# Altium PCB STM32 24V Industrial IO Bridge.PcbDoc (part 3 of 3)
Units mil, origin at the board's own origin, x right, y up, seen from the top; angles counter-clockwise.
Board outline 3937.01 x 3149.61 mil, 2 copper layers (Top Layer, Bottom Layer); 143 components, 89 nets, 439 pads, 318 vias.
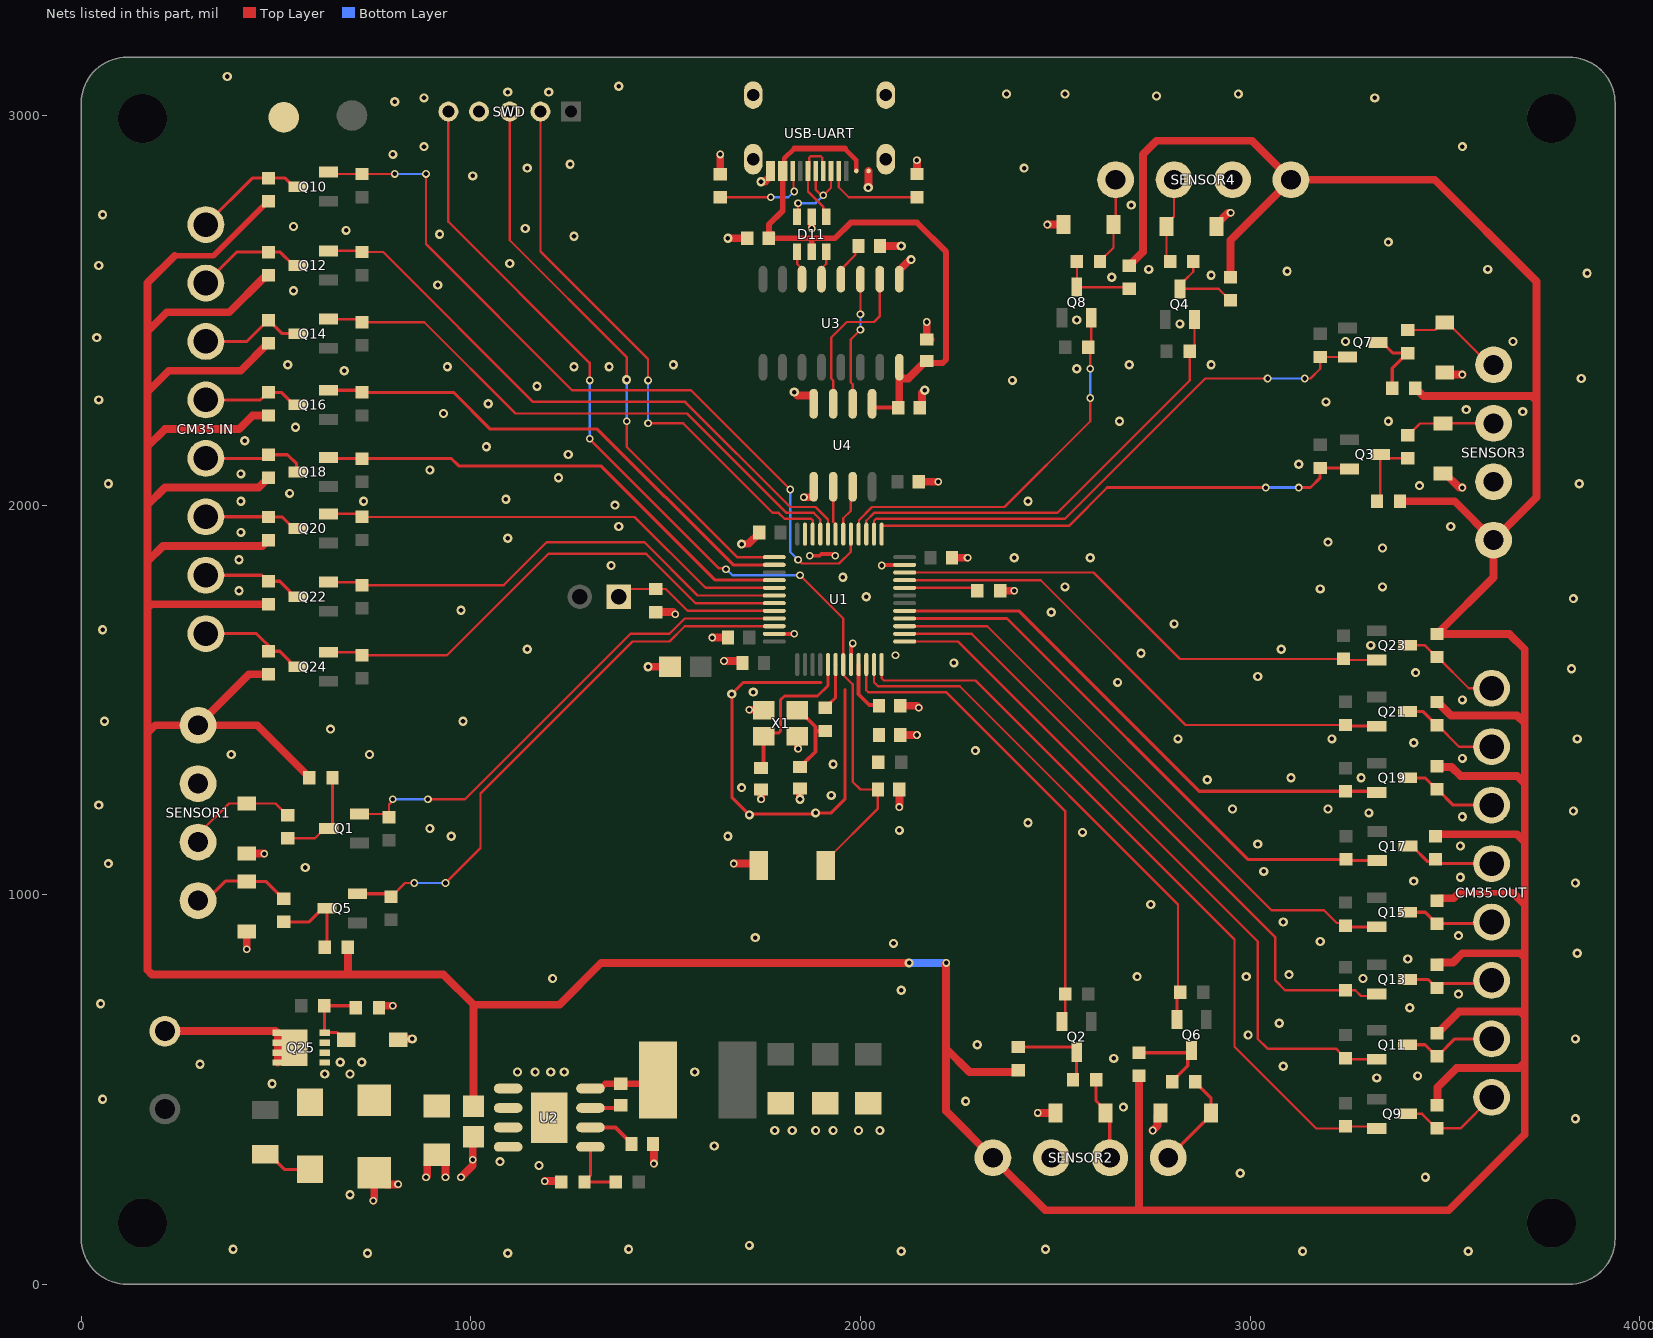
[diagram p2: the nets of this part, all layers, seen from the top]

## Via types
v1: diameter 23.62, hole 11.81, Top Layer to Bottom Layer, 228 vias
v2: diameter 19.68, hole 11.81, Top Layer to Bottom Layer, 90 vias

## Nets (pads, with @x,y where several pads share a name; then routed paths per layer and width w, separated by ;. In a path a pad name is that pad's centre, name@x,y a point inside that pad or via, vN(x,y) a via of type N, cw(c..) or ccw(c..) an arc to the next point about the centre after c; other vN are vias at no path point) (continued)
24V_PROTECTED: C11.2 C12.2 D9.1 D10.1 R7.1 R9.1 R11.1 R13.1 R20.1 R22.1 R24.1 R26.1 R29.2 R32.2 R34.2 R35.2 R38.2 R41.2 R43.2 R46.2 R47.2 R50.2 R51.2 R55.2 R56.2 R60.2 R61.2 R64.2 SENSOR1.1 SENSOR2.1 SENSOR3.1 SENSOR4.1 U2.2 U2.3 | length 16670.1
  Top Layer w15: 240,2640 339.55,2640 R32.2@479.55,2780 ; 3536.76,1005 3675,1005
  Top Layer w20: 240,2640 170,2570 170,2445 ; R32.2@479.55,2780 R32.2@480.68,2780 ; R64.2@480.68,1565.68 430.68,1565.68 SENSOR1.1@300,1435 ; R60.2@480.68,1745.34 180.34,1745.34 170,1735 ; R55.2@480.68,1910 479.55,1910 464.55,1895 210,1895 170,1855 ; R50.2@480.68,2070 479.55,2070 473.67,2064.12 473.67,2062.99 455.68,2045 215,2045 170,2000 ; R46.2@480.68,2230 440,2230 405,2195 215,2195 170,2150 ; R41.2@480.68,2415 479.55,2415 409.55,2345 225,2345 170,2290 ; R34.2@480.68,2590 474.8,2584.12 469.12,2584.12 380,2495 220,2495 170,2445 ; R7.1@585.68,1300 585.68,1301.13 451.81,1435 SENSOR1.1@300,1435 ; R20.1@684.66,865 684.66,795.34 ; C12.2@1007.2,457.16 1007.2,717.8 ; v1(2125,825) 1335,825 1227.8,717.8 1007.2,717.8 ; v2(2220,825) 2220,605 ; R9.1@2405,550 2400,545 2280,545 2220,605 ; R26.1@2690,2614.66 2691.13,2614.66 2697.01,2620.54 2697.01,2621.67 2725,2649.66 2725,2900 2760,2935 3005,2935 SENSOR4.1@3105,2835 ; R22.1@2715,535 2715,190 ; R13.1@2950,2585 2950,2680 SENSOR4.1@3105,2835 ; R11.1@3385,2010 3525,2010 SENSOR3.1@3625,1910 ; R24.1@3424.32,2300 3424.32,2298.87 3430.2,2292.99 3431.33,2292.99 3444.32,2280 3723.28,2280 3735,2268.28 ; R47.2@3476.26,1150 3477.39,1150 3482.39,1155 3685,1155 3705,1135 ; R35.2@3480,644.66 3481.13,644.66 3536.47,700 3693.28,700 3705,688.28 ; R38.2@3480,820 3485.88,825.88 3520.88,825.88 3545,850 3693.28,850 3705,838.28 ; R43.2@3480,985 3485.88,990.88 3522.63,990.88 3536.76,1005 ; R51.2@3480,1329.66 3481.67,1327.99 3517.01,1327.99 3540,1305 3685,1305 3705,1285 ; R56.2@3480,1494.66 3481.13,1494.66 3515.79,1460 3685,1460 3705,1440 ; R61.2@3480,1669.32 R61.2@3481.13,1669.32 ; R29.2@3481.13,459.66 3481.13,506.13 3530,555 3690,555 3705,570 ; 3675,1005 3705,975 ; 170,1415 170,807.06 181.72,795.34 684.66,795.34 ; 170,1415 170,1735 ; 170,1415 190,1435 SENSOR1.1@300,1435 ; 170,1735 170,1855 ; 170,1855 170,2000 ; 170,2000 170,2150 ; 170,2150 170,2290 ; 170,2290 170,2445 ; 684.66,795.34 929.66,795.34 1007.2,717.8 ; 2220,605 2220,445 SENSOR2.1@2339.99,325 2475,190 2715,190 ; 2715,190 3510,190 3705,385 3705,570 ; SENSOR4.1@3105,2835 3473.74,2835 3735,2573.74 3735,2268.28 ; R61.2@3481.13,1669.32 3665.68,1669.32 3705,1630 3705,1440 ; R61.2@3481.13,1669.32 3487.01,1675.2 3487.01,1676.33 3625,1814.32 SENSOR3.1@3625,1910 ; SENSOR3.1@3625,1910 3735,2020 3735,2268.28 ; 3705,570 3705,688.28 ; 3705,688.28 3705,838.28 ; 3705,838.28 3705,975 ; 3705,975 3705,1135 ; 3705,1135 3705,1285 ; 3705,1285 3705,1440
  Bottom Layer w20: v1(2125,825) v2(2220,825)
BOOT: C17.2 U2.7 | length 80.8
  Top Layer w10: U2.7@1307.2,452.79 1377.79,452.79 C17.2@1385,460
BOOT0: BOOT0.1 R1.1 U1.44 | length 430.3
  Top Layer w6: BOOT0.1@1380,1765 1399.66,1784.66 1500.34,1784.66 1556.37,1728.63 U1.44@1778.9,1728.63
CH340_RX: U3.3 U4.2 | length 332.4
  Top Layer w6: U4.2@1980,2260 1980,2310 1975,2315 1975,2425 v2(2000,2450) ; v2(2000,2490) U3.3@2000,2580
  Bottom Layer w6: v2(2000,2450) v2(2000,2490)
CH340_TX: U3.2 U4.3 | length 414.9
  Top Layer w6: U4.3@1930,2260 1930,2320 1925,2325 1925,2430 1965,2470 2035,2470 2050,2485 U3.2@2050,2580
GND: "RESET SW.2" C1.1 C2.1 C3.1 C4.2 C5.1 C6.1 C7.1 C8.1 C9.1 C10.2 C11.1 C12.1 C13.1 C14.1 C15.1 C16.1 C22.1 D1.1 D2.1 D3.1 D4.1 D5.1 D6.1 D7.1 D8.1 D10.2 D12.2 pad.3 Q25.1 Q25.2 Q25.3 R1.2 R28.1 R42.1 R66.1 SENSOR1.2 SENSOR2.2 SENSOR3.2 SENSOR4.2 SWD.4 U1.8 U1.23 U1.35 U1.47 U2.1 U2.4 U2.9 U4.5 X1.2 X1.4 | length 3099.8
  Top Layer w8: 1898.88,1545 1700,1545 v1(1670,1515) 1670,1250 v1(1715,1205) 1717.5,1207.5 1882.5,1207.5 v1(1885,1210) 1925,1210 1960,1245 1960,1525.99
  Top Layer w10: U1.47@1778.89,1669.58 1829.58,1669.58 v2(1830,1670) ; U1.35@1857.64,1901.09 U1.35@1857.64,1925.47 ; v2(1870,1870) 1894.84,1870 1899.84,1875 1927.38,1875 1932.38,1870 v2(1935,1870) ; U1.8@1975.75,1590.84 1975.75,1638.13 1980,1642.38 v2(1980,1645) ; v2(2055,1845) 2056.73,1846.73 U1.23@2113.54,1846.73
  Top Layer w20: v2(425,860) D5.1@425,905.65 ; D1.1@425,1105.65 469.35,1105.65 v2(470,1105) ; v2(750,215) 752.2,217.2 D10.2@752.2,286.91 782.51,256.61 v2(813.39,256.61) ; R66.1@764.32,710 769.32,715 v2(800,715) ; D12.2@814.13,627.79 816.34,630 v1(850,630) ; v2(885,275) 888.18,278.18 888.18,313.16 890,313.16 909.23,332.39 C11.1@912.2,332.39 915.77,332.39 935,313.16 v2(935,275) ; v2(975,275) 1005,305 1005,376.22 C12.1@1007.2,378.42 ; v2(1190,265) 1230.33,265 R42.1@1232.54,262.79 ; v1(1455,1585) C10.2@1511.26,1585 ; C13.1@1467.56,360 1470,357.56 v2(1470,310) ; R1.2@1475,1725.34 1519.66,1725.34 v2(1525,1720) ; v2(1620,1660) C3.1@1659.88,1660 ; v2(1650,1600) 1692.44,1600 C1.1@1697.44,1595 ; v2(1675,1080) 1733.98,1080 1738.98,1075 ; v1(1695,1900) 1695.69,1900.69 1712.66,1900.69 1740,1928.03 C5.1@1740,1930 ; v2(1715,1475) 1750.16,1475 X1.4@1751.69,1473.46 ; v2(1745,1245) C2.1@1745,1269.88 ; X1.2@1838.31,1406.54 1840,1404.85 v2(1840,1375) ; v1(1845,1245) C4.2@1845,1272.44 ; v2(1855,2020) 1878.9,2020 1880,2021.1 U4.5@1880,2047 ; v2(2100,1225) C9.1@2100,1270 ; C7.1@2102.56,1410 v2(2145,1410) ; C6.1@2102.56,1485 2145,1485 v2(2150,1480) ; C22.1@2150,2060 v2(2200,2060) ; C8.1@2235.12,1865 v2(2275,1865) ; R28.1@2359.32,1780 v2(2395,1780) ; v2(2455,440) D2.1@2500.66,440 ; v2(2480,2720) D8.1@2520.66,2720 ; v2(2750,395) 2762.76,407.75 2762.76,432.1 D6.1@2770.66,440 ; D4.1@2914.34,2715 2914.34,2721.1 2943.24,2750 v2(2950,2750) ; D3.1@3495,2080.66 3501.1,2080.66 3536.76,2045 v2(3545,2045) ; D7.1@3500,2340 3505,2335 v2(3545,2335)
  other v1: 735,80 1095,80 2105,85 3135,85 3560,85 390,90 1405,90 2475,90 1715,100 690,230 3450,275 2975,285 1175,305 1075,315 1625,355 1780,395 1825,395 1885,395 1930,395 1995,395 2050,395 3835,425 2675,455 2270,470 55,475 490,515 3325,530 3430,535 625,540 690,540 1120,545 1165,545 1205,545 1240,545 1575,545 3085,560 305,565 665,570 720,570 2650,580 2300,615 3835,630 2995,640 3075,670 3410,710 50,720 3535,745 2105,755 1210,785 3290,785 2710,790 2990,790 3100,795 3405,835 3840,850 2085,875 3180,880 1730,890 3535,895 3085,930 2745,975 3835,1030 3420,1035 3540,1045 3035,1060 575,1070 70,1080 3540,1125 3020,1130 950,1150 1660,1150 2570,1160 2100,1165 895,1170 2430,1185 3545,1200 3305,1210 3830,1215 2955,1220 3200,1220 45,1230 1925,1255 1695,1275 2890,1295 3105,1300 3285,1300 1930,1335 3545,1350 385,1360 740,1360 2295,1370 3420,1390 2815,1400 3210,1400 3840,1400 640,1425 60,1445 980,1445 3545,1500 1725,1520 2660,1545 3020,1560 3425,1570 3825,1580 2240,1595 2720,1620 1145,1630 3080,1630 3310,1640 55,1680 2805,1695 2490,1725 975,1730 3830,1760 2015,1765 405,1780 3180,1785 2525,1790 3340,1790 1955,1815 1360,1845 405,1860 2395,1865 2590,1865 3340,1890 3200,1905 1095,1915 410,1930 1380,1945 3515,1945 1370,2000 410,2010 725,2010 2430,2010 1090,2015 535,2030 3435,2050 70,2055 3845,2055 1225,2070 410,2080 895,2090 3125,2105 1250,2130 1040,2150 420,2165 550,2200 2665,2215 3355,2215 930,2235 3700,2240 3555,2245 1045,2260 3195,2265 45,2270 1170,2305 2390,2320 3850,2325 675,2345 2555,2350 940,2355 1265,2355 1355,2355 530,2360 1520,2360 2690,2360 2900,2360 3245,2420 3675,2420 40,2430 2820,2465 2555,2475 545,2550 915,2565 2645,2585 2900,2590 3865,2595 3095,2600 2740,2605 3610,2605 45,2615 1100,2620 3355,2675 1265,2690 920,2695 680,2705 1140,2710 545,2715 55,2745 2695,2770 1005,2845 1145,2865 2420,2865 1255,2875 800,2900 880,2920 3545,2920 805,3035 880,3045 3320,3045 2760,3050 2375,3055 2525,3055 2970,3055 1095,3060 1200,3060 1380,3075 375,3100
  other v2: 1005,320 2090,1615
GND_IN_RAW: "24V IN.2" Q25.5 Q25.6 Q25.7 Q25.8 Q25.9 | length 367.7
  Top Layer w20: 215,650 498.44,650 502.26,646.18 Q25.5@504.31,646.18 Q25.6@504.31,620.59 Q25.7@504.31,595 Q25.8@504.31,569.4
IN11: Q10.2 R31.1 U1.29 | length 2014.9
  Top Layer w6: Q10.2@635.05,2854.8 640.19,2849.66 R31.1@720.68,2849.66 721.02,2850 v2(805,2850) ; v2(885,2850) 885,2670 1260,2295 1565,2295 v2(1820,2040) ; v2(1840,1860) 1840.36,1860 1850.36,1850 1945,1850 1975,1880 1975,1924.72 U1.29@1975.75,1925.47 U1.29@1975,1926.22
  Bottom Layer w6: v2(805,2850) v2(885,2850) ; v2(1820,2040) 1820,1880 v2(1840,1860)
IN12: Q12.2 R33.1 U1.32 | length 1604.9
  Top Layer w6: Q12.2@635.05,2652.4 717.94,2652.4 R33.1@720.68,2649.66 775.34,2649.66 1160,2265 1550,2265 1820,1995 1885,1995 1916.69,1963.31 U1.32@1916.69,1925.47
IN13: Q14.2 R40.1 U1.33 | length 1512.6
  Top Layer w6: Q14.2@635.05,2477.4 712.6,2477.4 R40.1@720.68,2469.32 880.68,2469.32 1115,2235 1555,2235 1810,1980 1880,1980 1897.04,1962.96 U1.33@1897.01,1925.47
IN14: Q16.2 R45.1 U1.38 | length 1329.4
  Top Layer w8: Q16.2@635.05,2294.8 715.2,2294.8 R45.1@720.68,2289.32 955.68,2289.32 1050,2195 1325,2195 1673.27,1846.73 U1.38@1778.9,1846.74
IN15: Q18.2 R49.1 U1.40 | length 1274.3
  Top Layer w8: Q18.2@635.05,2122.4 638.13,2119.32 R49.1@720.68,2119.32 950.68,2119.32 970,2100 1335,2100 1627.64,1807.36 U1.40@1778.9,1807.37
IN16: Q20.2 R54.1 U1.41 | length 1222.4
  Top Layer w6: Q20.2@635.05,1977.4 712.94,1977.4 R54.1@720.68,1969.66 1420.34,1969.66 1602.31,1787.69 U1.41@1778.9,1787.69
IN17: Q22.2 R59.1 U1.42 | length 1249.8
  Top Layer w6: Q22.2@635.05,1802.4 712.6,1802.4 R59.1@720.68,1794.32 1084.32,1794.32 1195,1905 1445,1905 1582.01,1767.99 U1.42@1778.9,1768
IN18: Q24.2 R63.1 U1.43 | length 1307.4
  Top Layer w6: Q24.2@635.05,1622.4 712.94,1622.4 R63.1@720.68,1614.66 938.99,1614.66 1199.33,1875 1450,1875 1576.69,1748.31 U1.43@1778.89,1748.32
MCU_NRST: "RESET SW.1" C9.2 SWD.5 U1.7 | length 2584.6
  Top Layer w6: SWD.5@942.52,3010 942.52,2727.48 1305,2365 v2(1305,2320) ; v2(1305,2170) 1637.38,1837.62 1652.38,1837.62 v2(1655,1835) ; v2(1845,1820) 1956.05,1708.95 1956.05,1565.37 1958.37,1563.05 1958.37,1561.63 1980,1540 1980,1290 2000,1270 C9.2@2044.88,1270 2044.88,1221.26 1911.02,1087.4 1911.02,1075
  Bottom Layer w6: v2(1305,2170) v2(1305,2320) ; v2(1655,1835) 1656.65,1835 1671.65,1820 v2(1845,1820)
MCU_UART_RX: U1.31 U4.6 | length 124.2
  Top Layer w6: U4.6@1930,2047 1930,1957.32 1936.38,1950.93 U1.31@1936.38,1925.47
MCU_UART_TX: U1.30 U4.7 | length 131.4
  Top Layer w6: U1.30@1956.05,1925.47 1956.05,1966.05 1975,1985 1975,2010.37 1980,2015.37 U4.7@1980,2047
NetC2_2: C2.2 U1.5 X1.1 | length 404.4
  Top Layer w8: X1.1@1751.69,1406.54 1760.47,1415.31 1790.31,1415.31 1795,1420 1795,1500 1805,1510 1890,1510 1916.69,1536.69 U1.5@1916.69,1590.84
  Top Layer w10: C2.2@1745,1325 1751.69,1331.69 X1.1@1751.69,1406.54 ; U1.5@1916.57,1590.72 U1.5@1916.69,1590.84
NetC4_1: C4.1 R6.1 X1.3 | length 210.4
  Top Layer w10: X1.3@1838.31,1473.46 1842.25,1473.46 1884.5,1431.22 1884.5,1420.34 ; C4.1@1845,1327.56 1846.97,1327.56 1857.72,1338.31 1857.72,1340.28 1884.5,1367.06 1884.5,1420.34 ; R6.1@1910,1420.34 1884.5,1420.34
NetC13_2: C13.2 U2.6 | length 124.1
  Top Layer w10: U2.6@1307.2,402.79 1371.62,402.79 1412.44,361.97 C13.2@1412.44,360
NetC20_2: C20.2 U3.4 | length 103.6
  Top Layer w6: U3.4@1950,2580 1950,2605 1986.8,2641.8 1986.8,2656.8 C20.2@1995,2665
NetCN5_1: "CM35 OUT.1" Q9.3 R29.1 | length 264.7
  Top Layer w6: Q9.3@3403.74,437.6 3441.61,437.6 3478.87,400.34 R29.1@3480,400.34 3540.34,400.34 3619.99,479.99
NetCN5_2: "CM35 OUT.2" Q11.3 R35.1 | length 247
  Top Layer w8: Q11.3@3403.74,615 3449.21,615 3478.87,585.34 R35.1@3480,585.34 3481.13,585.34 3525.78,629.99 3619.99,629.99
NetCN5_3: "CM35 OUT.3" Q13.3 R38.1 | length 233.3
  Top Layer w8: Q13.3@3403.74,782.6 3456.95,782.6 3478.87,760.68 R38.1@3480,760.68 3491.88,772.56 3612.56,772.56 3620,779.99
NetCN5_4: "CM35 OUT.4" Q15.3 R43.1 | length 231.3
  Top Layer w8: Q15.3@3403.74,955 3449.55,955 3478.87,925.68 3615.68,925.68 3620,930 ; R43.1@3478.87,915.68 R43.1@3480,915.68
NetCN5_5: "CM35 OUT.5" Q17.3 R47.1 | length 238.3
  Top Layer w8: Q17.3@3405,1125 3415.83,1125 3455.83,1085 3470.58,1085 R47.1@3476.26,1090.68 3486.94,1080 3619.99,1080
NetCN5_6: "CM35 OUT.6" Q19.3 R51.1 | length 245.3
  Top Layer w8: Q19.3@3403.74,1300 3449.21,1300 3478.87,1270.34 R51.1@3480,1270.34 3481.13,1270.34 3521.47,1230 3620,1230
NetCN5_7: "CM35 OUT.7" Q21.3 R56.1 | length 253.5
  Top Layer w6: R56.1@3480,1435.34 3481.13,1435.34 3536.47,1380 3619.99,1380
  Top Layer w8: Q21.3@3403.74,1470 3444.21,1470 3478.87,1435.34 R56.1@3480,1435.34
NetCN5_8: "CM35 OUT.8" Q23.3 R61.1 | length 261.8
  Top Layer w6: Q23.3@3403.74,1640 3448.87,1640 3478.87,1610 R61.1@3480,1610 3481.13,1610 3561.13,1530 3619.99,1530
NetCN6_1: "CM35 IN.1" Q10.3 R32.1 | length 318.2
  Top Layer w8: 336.54,2736.54 320,2720 439.33,2839.32 R32.1@480.68,2839.32 523.56,2839.32 545.48,2817.4 Q10.3@556.31,2817.4
NetCN6_2: "CM35 IN.2" Q12.3 R34.1 | length 283.9
  Top Layer w8: 320,2570 400,2650 480,2650 R34.1@480.68,2649.32 511.16,2649.32 545.48,2615 Q12.3@556.31,2615
NetCN6_3: "CM35 IN.3" Q14.3 R41.1 | length 273
  Top Layer w8: 320.01,2419.99 425.22,2419.99 479.55,2474.32 R41.1@480.68,2474.32 481.81,2474.32 516.13,2440 Q14.3@556.31,2440
NetCN6_4: "CM35 IN.4" Q16.3 R46.1 | length 257.5
  Top Layer w8: 320,2269.99 460.22,2269.99 479.55,2289.32 R46.1@480.68,2289.32 513.56,2289.32 545.48,2257.4 Q16.3@556.31,2257.4
NetCN6_5: "CM35 IN.5" Q18.3 R50.1 | length 268.9
  Top Layer w8: 320.01,2119.99 471.35,2119.99 R50.1@480.68,2129.32 529.74,2129.32 552.96,2106.09 552.96,2088.34 Q18.3@556.31,2085
NetCN6_6: "CM35 IN.6" Q20.3 R55.1 | length 248.7
  Top Layer w8: 320,1969.99 480.01,1969.99 R55.1@480.68,1969.32 516.16,1969.32 545.48,1940 Q20.3@556.31,1940
NetCN6_7: "CM35 IN.7" Q22.3 R60.1 | length 261.4
  Top Layer w8: 320,1820 464.21,1820 479.55,1804.66 R60.1@480.68,1804.66 509.69,1804.66 535.7,1778.64 535.7,1774.78 545.48,1765 Q22.3@556.31,1765
NetCN6_8: "CM35 IN.8" Q24.3 R64.1 | length 274
  Top Layer w8: 320.01,1669.99 450.19,1669.99 495.18,1625 509.69,1625 535.7,1598.98 535.7,1594.78 545.48,1585 Q24.3@556.31,1585
NetD9_2: D9.2 F1.2 | length 131.1
  Top Layer w8: F1.2@472.2,334.01 482.79,334.01 521.64,295.16 D9.2@587.2,295.16
NetD12_1: D12.1 Q25.4 R65.1 R66.2 | length 214.7
  Top Layer w8: D12.1@680.27,627.79 675.35,627.79 656.96,646.18 Q25.4@625,646.18 624.32,646.86 R65.1@624.32,715 700,715 R66.2@705,710
NetQ1_3: Q1.3 R2.2 R7.2 | length 249.9
  Top Layer w6: R2.2@530,1145 599.8,1145 624.8,1170 Q1.3@635.63,1170
  Top Layer w8: Q1.3@635.63,1170 645,1179.37 R7.2@645,1300
NetQ2_3: Q2.3 R3.2 R9.2 | length 232.5
  Top Layer w8: R9.2@2405,609.32 2545.22,609.32 2555,599.54 Q2.3@2555,595.63 2555,534.32 R3.2@2545.68,525
NetQ3_3: Q3.3 R4.2 R11.2 | length 198.2
  Top Layer w6: R11.2@3325.68,2010 3334.37,2018.69 Q3.3@3334.37,2130 3344.03,2120.34 R4.2@3405,2120.34
NetQ4_3: Q4.3 R5.2 R13.2 | length 227
  Top Layer w6: R5.2@2854.32,2625 2854.32,2598.99 2831.93,2576.61 2830.78,2576.61 2820,2565.83 Q4.3@2820,2555 2919.55,2555 2948.87,2525.68 R13.2@2950,2525.68
NetQ5_3: Q5.3 R15.2 R20.2 | length 227.2
  Top Layer w8: R15.2@520,930.34 585.14,930.34 619.8,965 Q5.3@630.63,965 630.63,870.29 R20.2@625.34,865
NetQ6_3: Q6.3 R16.2 R22.2 | length 223
  Top Layer w8: R22.2@2715,594.32 Q6.3@2843.69,594.32 ; R16.2@2800.34,520 2800.34,521.13 2840.22,561.01 2840.22,590.85 Q6.3@2843.69,594.32 ; Q6.3@2845.11,595.74 Q6.3@2843.69,594.32
NetQ7_3: Q7.3 R17.2 R24.2 | length 193.7
  Top Layer w8: Q7.3@3328.74,2417.4 3339.57,2417.4 3366.97,2390 R17.2@3403.87,2390 ; R24.2@3365,2300 3365,2351.13 R17.2@3403.87,2390 ; R17.2@3405,2390 R17.2@3403.87,2390
NetQ8_3: Q8.3 R18.2 R26.2 | length 203.7
  Top Layer w6: R18.2@2555.68,2625 2555.68,2560.05 Q8.3@2555,2559.37 2685.97,2559.37 R26.2@2690,2555.34 R26.2@2691.13,2555.34
NetR6_2: R6.2 U1.6 | length 127.9
  Top Layer w8: R6.2@1910,1479.66 1911.13,1479.66 1923.01,1491.54 1923.01,1492.67 1936.38,1506.04 U1.6@1936.38,1590.84
  Top Layer w10: R6.2@1906.38,1483.28 R6.2@1910,1479.66
NetR28_2: R28.2 U1.20 | length 189.6
  Top Layer w6: U1.20@2113.54,1787.68 2292.32,1787.68 R28.2@2300,1780
NetR37_1: R37.1 R42.2 U2.5 | length 176.7
  Top Layer w8: U2.5@1307.2,352.79 1307.2,279.26 1291.86,263.92 R42.2@1291.86,262.79 R37.1@1372.2,262.79
NetR53_2: R53.2 USB-UART.A5 | length 256.7
  Top Layer w6: USB-UART.A5@1944.21,2857.59 1944.21,2815.79 1970,2790 R53.2@2148.45,2790
NetR57_2: R57.2 USB-UART.B5 | length 250.4
  Top Layer w6: R57.2@1640,2790 v2(1770,2790) ; USB-UART.B5@1826.1,2857.59 1828.05,2855.64 1828.05,2806.95 v2(1830,2805)
  Bottom Layer w6: v2(1770,2790) 1815,2790 v2(1830,2805)
OUT1: Q9.2 R30.1 U1.12 | length 1949.9
  Top Layer w6: U1.12@2054.49,1590.84 2054.49,1555.51 2060,1550 2295,1550 2960,885 2960,610 3170,400 3239.66,400 R30.1@3245,405.34 3319.86,405.34 Q9.2@3325,400.2
OUT2: Q11.2 R36.1 U1.13 | length 1802.7
  Top Layer w6: U1.13@2113.54,1649.88 2250.12,1649.88 3020,880 3020,630 3045,605 3220.68,605 3230.99,594.69 3230.99,593.56 3243.87,580.68 R36.1@3245,580.68 3248.08,577.6 Q11.2@3325,577.6
OUT3: Q13.2 R39.1 U1.14 | length 1663.1
  Top Layer w6: U1.14@2113.53,1669.57 2285.43,1669.57 3065,890 3065,780 3090,755 R39.1@3245,755 3270,755 3285,740 3319.8,740 Q13.2@3325,745.2
OUT4: Q15.2 R44.1 U1.15 | length 1531.1
  Top Layer w6: U1.15@2113.54,1689.25 2325.75,1689.25 3055,960 3190,960 3222.51,927.49 3238.19,927.49 R44.1@3245,920.68
  Top Layer w8: R44.1@3245,920.68 3248.08,917.6 Q15.2@3325,917.6
OUT5: Q17.2 R48.1 U1.16 | length 1470.1
  Top Layer w8: U1.16@2113.53,1708.94 2376.06,1708.94 2994.32,1090.68 R48.1@3246.26,1090.68 3249.34,1087.6 Q17.2@3326.26,1087.6
OUT6: Q19.2 R52.1 U1.17 | length 1404.5
  Top Layer w8: U1.17@2113.54,1728.62 2406.38,1728.62 2869.32,1265.68 R52.1@3245,1265.68 3321.92,1265.68 Q19.2@3325,1262.6
OUT7: Q21.2 R58.1 U1.21 | length 1366.7
  Top Layer w6: U1.21@2113.54,1807.36 2462.64,1807.36 2834.32,1435.68 R58.1@3245,1435.68
  Top Layer w8: R58.1@3245,1435.68 3248.08,1432.6 Q21.2@3325,1432.6
OUT8: Q23.2 R62.1 U1.22 | length 1305
  Top Layer w6: U1.22@2113.54,1827.05 2597.95,1827.05 2820,1605 3239.32,1605 R62.1@3240,1605.68 3243.08,1602.6 Q23.2@3325,1602.6
S1_NC_FIELD: D5.2 R15.1 SENSOR1.4 | length 259.5
  Top Layer w8: SENSOR1.4@300,985 320,985 370,1035 424.35,1035 D5.2@425,1034.35 474.18,1034.35 518.87,989.66 R15.1@520,989.66
S1_NO_FIELD: D1.2 R2.1 SENSOR1.3 | length 295.3
  Top Layer w6: SENSOR1.3@300,1135 300,1155 379.35,1234.35 D1.2@425,1234.35 498.84,1234.35 528.87,1204.32 R2.1@530,1204.32
S2_NC_FIELD: D6.2 R16.1 SENSOR2.4 | length 263.6
  Top Layer w8: SENSOR2.4@2794.69,329.69 SENSOR2.4@2790,325 2790.45,325 2899.34,433.9 D6.2@2899.34,440 2899.34,479.18 2859.66,518.87 R16.1@2859.66,520
S2_NO_FIELD: D2.2 R3.1 SENSOR2.3 | length 212.7
  Top Layer w8: R3.1@2605,525 2605,470.44 D2.2@2632.39,443.05 ; D2.2@2629.34,440 2640,429.34 SENSOR2.3@2639.99,325
S3_NC_FIELD: D7.2 R17.1 SENSOR3.4 | length 273
  Top Layer w6: R17.1@3405,2449.32 3474.53,2449.32 3493.9,2468.69 D7.2@3500,2468.69 3506.1,2468.69 3614.79,2360 SENSOR3.4@3625,2360
S3_NO_FIELD: D3.2 R4.1 SENSOR3.3 | length 232.6
  Top Layer w6: R4.1@3405,2179.66 3406.13,2179.66 3435.82,2209.34 D3.2@3495,2209.34 3495.66,2210 SENSOR3.3@3625,2210
S4_NC_FIELD: D8.2 R18.1 SENSOR4.4 | length 226.6
  Top Layer w6: R18.1@2615,2625 2615,2626.13 2649.34,2660.48 D8.2@2649.34,2720 2655,2725.65 SENSOR4.4@2654.99,2835
S4_NO_FIELD: D4.2 R5.1 SENSOR4.3 | length 221.9
  Top Layer w6: R5.1@2795,2625 2785.66,2634.34 D4.2@2785.66,2715 2785.66,2721.1 2805,2740.45 SENSOR4.3@2805,2835
SENSOR1_NC: Q5.2 R21.2 U1.46 | length 1442.9
  Top Layer w6: R21.2@795,997.71 R21.2@795,994.66 R21.2@796.13,994.66 ; R21.2@797.09,995.62 831.47,1030 v2(855,1030) ; v2(935,1030) 1025,1120 1025,1260 1415,1650 1510,1650 1549.26,1689.26 U1.46@1778.9,1689.26
  Top Layer w8: Q5.2@709.37,1002.4 790.31,1002.4 R21.2@795,997.71
  Bottom Layer w6: v2(855,1030) v2(935,1030)
SENSOR1_NO: Q1.2 R8.2 U1.45 | length 1299.9
  Top Layer w6: Q1.2@714.37,1207.4 781.92,1207.4 R8.2@790,1199.32 790,1231.3 800,1241.3 v2(800,1245) ; v2(890,1245) 985,1245 1410,1670 1510,1670 1548.95,1708.95 U1.45@1778.89,1708.95
  Bottom Layer w6: v2(800,1245) v2(890,1245)
SENSOR2_NC: Q6.2 R23.2 U1.11 | length 1360
  Top Layer w6: U1.11@2034.79,1590.84 2034.79,1545.21 2045,1535 2255,1535 2815,975 2815,747.6 R23.2@2816.64,745.96
  Top Layer w8: Q6.2@2812.6,679.37 2812.6,741.92 R23.2@2816.64,745.96
SENSOR2_NO: Q2.2 R10.2 U1.10 | length 1248.2
  Top Layer w6: U1.10@2015.12,1590.84 2015.12,1524.88 2020,1520 2220,1520 2525.34,1214.66 R10.2@2525.34,745 2525.34,682.11 Q2.2@2517.6,674.37
SENSOR3_NC: Q7.2 R25.2 U1.26 | length 1441.2
  Top Layer w6: U1.26@2034.79,1925.47 2035,1925.68 2035,1960 2040,1965 2525,1965 2885,2325 v2(3045,2325) ; v2(3140,2325) 3155,2325 3180,2350 R25.2@3180,2380 Q7.2@3250,2380
  Bottom Layer w6: v2(3045,2325) v2(3140,2325)
SENSOR3_NO: Q3.2 R12.2 U1.25 | length 1298.7
  Top Layer w6: U1.25@2054.49,1925.47 2054.49,1944.55 2056.63,1946.68 2535.04,1946.68 2633.35,2045
  Top Layer w8: 2633.35,2045 v2(3040,2045) ; v2(3125,2045) 3155,2045 3180,2070 R12.2@3180,2095.34 3252.89,2095.34 Q3.2@3255.63,2092.6
  Bottom Layer w8: v2(3040,2045) v2(3125,2045)
SENSOR4_NC: Q8.2 R27.2 U1.28 | length 1005.7
  Top Layer w6: U1.28@1995.42,1925.47 1996.31,1926.36 1996.31,1961.31 2030,1995 2370,1995 2590,2215 v2(2590,2275) ; v2(2590,2350) 2590,2400 R27.2@2585,2405 2592.4,2412.4 Q8.2@2592.4,2480.63
  Bottom Layer w6: v2(2590,2275) v2(2590,2350)
SENSOR4_NO: Q4.2 R14.2 U1.27 | length 1175.1
  Top Layer w6: U1.27@2015.12,1925.47 2015,1925.59 2015,1960 2035,1980 2505,1980 2845,2320 R14.2@2845,2395 2857.4,2407.4 Q4.2@2857.4,2476.26
SW_NODE: C17.1 L1.1 U2.8 | length 182
  Top Layer w16: U2.8@1307.2,502.79 1332.62,502.79 1344.95,515.12 C17.1@1385,515.12 1470.12,515.12 L1.1@1480,525
SWCLK: SWD.3 U1.37 | length 1480.6
  Top Layer w6: SWD.3@1100,3010 1100,2680 1400,2380 v1(1400,2321.81) ; v2(1400,2215) 1400,2150 1683.57,1866.43 U1.37@1778.9,1866.43
  Bottom Layer w6: v2(1400,2215) v1(1400,2321.81)
SWDIO: SWD.2 U1.34 | length 1475.7
  Top Layer w6: SWD.2@1178.74,3010 1178.74,2651.26 1455,2375 v2(1455,2320) ; v2(1455,2210) 1545,2210 1775,1980 1790,1980 1805,1965 1873.8,1965 1877.32,1961.49 U1.34@1877.32,1925.47
  Bottom Layer w6: v2(1455,2210) v2(1455,2320)
USB_DM: D11.4 U3.6 | length 74.9
  Top Layer w6: D11.4@1837.6,2649.76 1837.6,2619.24 1850,2606.84 U3.6@1850,2580
USB_DM_RAW: D11.3 USB-UART.A7 USB-UART.B7 | length 253.6
  Top Layer w6: D11.3@1837.6,2740.24 1840,2742.64 v2(1840,2775) ; USB-UART.A7@1885.16,2857.59 1885,2857.43 1885,2810 1890.16,2804.84 ; 1890.19,2804.84 1900.03,2795 v2(1905,2795) 1924.53,2814.53 USB-UART.B7@1924.53,2857.59
  Bottom Layer w6: v2(1840,2775) 1885,2775 v2(1905,2795)
USB_DP: D11.6 U3.5 | length 74.9
  Top Layer w6: U3.5@1900,2580 1900,2606.84 1912.4,2619.24 D11.6@1912.4,2649.76
USB_DP_RAW: D11.1 USB-UART.A6 USB-UART.B6 | length 243.5
  Top Layer w6: USB-UART.A6@1904.84,2857.59 1901.93,2860.5 1901.93,2891.49 1898.42,2895 1871.89,2895 1868.38,2891.49 1868.38,2860.5 USB-UART.B6@1865.47,2857.59 1865.47,2804.53 1904.93,2765.07 1904.93,2747.71 D11.1@1912.4,2740.24
USB_GND: C18.1 C19.2 C20.1 C21.1 D11.2 R53.1 R57.1 U3.1 U4.4 USB-UART.1 USB-UART.2 USB-UART.3 USB-UART.4 USB-UART.A1B12 USB-UART.B1A12 | length 526
  Top Layer w20: R57.1@1640,2849.32 v2(1640,2900) ; v1(1660,2685) C18.1@1709.88,2685 ; v1(1744.9,2830.09) 1745.59,2830.78 1755.98,2830.78 1769.01,2843.82 USB-UART.B1A12@1769.01,2857.59 ; v1(1830,2290) 1838.81,2281.19 1878.9,2281.19 1880,2280.09 U4.4@1880,2260 ; v2(1875,2710) D11.2@1875,2740.24 ; v1(2020,2815) 2020.69,2815.69 2020.69,2851.67 2020.98,2851.96 USB-UART.A1B12@2020.98,2857.59 ; C20.1@2050.12,2665 v1(2105,2665) ; U3.1@2100,2580 2100,2602.77 2126.53,2629.31 2129.31,2629.31 v1(2130,2630) ; R53.1@2145,2864.66 v2(2145,2885) ; C21.1@2152.56,2250 2158.31,2255.75 2158.31,2288.31 v1(2165,2295) ; C19.2@2170,2425 C19.2@2180,2425 ; C19.2@2170,2435 v2(2170,2470)
USB_VBUS: C18.2 C19.1 C21.2 D11.5 U3.16 U4.1 USB-UART.A4B9 USB-UART.B4A9 | length 1573.5
  Top Layer w10: U4.1@2030,2260 2030,2255.72 2035.72,2250 C21.2@2090,2250
  Top Layer w12: USB-UART.B4A9@1800.51,2857.59 1804.81,2861.9 1804.81,2889.81 1830,2915 ; 1960,2915 1989.49,2885.51 USB-UART.A4B9@1989.49,2857.6
  Top Layer w15: C18.2@1774.02,2695.98 1765,2686.97 C18.2@1765,2685 ; USB-UART.B4A9@1800.51,2857.59 1800.51,2755.51 1765,2720 C18.2@1765,2685 ; 1830,2915 1960,2915 ; D11.5@1875,2649.76 1875,2682.61 1872.61,2685 ; C19.1@2168.03,2369.88 2172.91,2365 2211.21,2365 2220,2373.79 2220,2650 2145,2725 1975,2725 1935,2685 1872.61,2685 ; C18.2@1765,2685 1872.61,2685
  Top Layer w20: C21.2@2097.44,2250 2099.61,2252.17 2099.61,2325 2123.15,2325 C19.1@2168.03,2369.88
VDDA: C6.2 C7.2 R19.2 U1.9 | length 140.5
  Top Layer w10: U1.9@1995.42,1590.84 1995.42,1514.58 2022.55,1487.45 2044.99,1487.45 C6.2@2047.44,1485
pads on no net: U1.2 U1.3 U1.4 U1.18 U1.19 U1.39 U3.7 U3.8 U3.9 U3.10 U3.11 U3.12 U3.13 U3.14 U3.15 USB-UART.A8 USB-UART.B8

## Polygon pours and split planes (outlines as drawn)
GND on Top Layer "NONET_L-01_P-001" (solid, remove dead copper, pour order 13): -590,3205 -575,3220 4215,3220 4215,-175 -325,-175 -325,3125 -460,3260
GND on Top Layer "NONET_L-01_P-001" (solid, remove dead copper, pour order 11): 945,375 945,405 1040,405 1045,400 1045,250 860,250 850,260 850,375
GND on Top Layer "NONET_L-01_P-001" (solid, remove dead copper, pour order 10): 1075,560 1080,555 1255,555 1255,370 1245,360 1155,360 1155,485 1150,490 1060,490 1060,560
GND on Top Layer "NONET_L-01_P-001" (solid, remove dead copper, pour order 9): 2085,500 2110,500 2110,315 2105,320 1750,320 1750,495 1755,500
GND on Top Layer "NONET_L-01_P-001" (solid, remove dead copper, pour order 8): 605,630 650,630 650,595 655,590 720,590 720,530 715,525 605,525
VDDA on Top Layer "NONET_L-01_P-001" (solid, remove dead copper, pour order 3): 2025,1495 2030,1500 2065,1500 2065,1330 2060,1325 2025,1325
3V3 on Top Layer "NONET_L-01_P-001" (solid, remove dead copper, pour order 2): 1635,620 1655,640 2075,640 2080,635 2080,555 1765,555 1740,530 1635,530
24V_PROTECTED on Top Layer "NONET_L-01_P-001" (solid, remove dead copper, pour order 1): 550,505 555,510 850,510 875,485 1035,485 1052.5,467.5 1055,470 1130,470 1130,395 1060,395 1060,415 1045,430 550,430
24V_IN_RAW on Top Layer "NONET_L-01_P-001" (solid, remove dead copper, pour order 0): 170,490 175,485 510,485 510,420 515,415 510,410 170,410 170,485
GND on Bottom Layer "NONET_L-01_P-001" (solid, remove dead copper, pour order 7): -165,3155 4030,3155 4040,3145 4040,-140 -80,-140 -170,-50 -170,3150
USB_GND on Bottom Layer "NONET_L-01_P-001" (solid, remove dead copper, pour order 5): 2250,3170 2250,2220 1805,2220 1520,2505 1520,3140 1490,3170 1520,3140 1490,3170

## Keep-outs
Keep-Out Layer:
  circle w10: c3773.23,157.48 r137.8
  circle w10: c157.48,2992.13 r137.8
  circle w10: c3773.23,2992.13 r137.8
  circle w10: c157.48,157.48 r137.8
  region: 3730.75,295 3745.75,280 3840.75,280 3905.75,215 3905.75,95 3845.75,35 3740.75,35 3725.75,20 3695.75,50 3680.75,50 3680.75,60 3635.75,105 3635.75,190 3655.75,210 3655.75,225 3795.75,225 3805.75,235 3660.75,235 3660.75,230 3835.75,230 3830.75,235 3675.75,235 3670.75,240 3715.75,285 3815.75,285
  region: 115,3129.65 130,3114.65 225,3114.65 290,3049.65 290,2929.65 230,2869.65 125,2869.65 110,2854.65 80,2884.65 65,2884.65 65,2894.65 20,2939.65 20,3024.65 40,3044.65 40,3059.65 180,3059.65 190,3069.65 45,3069.65 45,3064.65 220,3064.65 215,3069.65 60,3069.65 55,3074.65 100,3119.65 200,3119.65
  region: 3730.75,3129.65 3745.75,3114.65 3840.75,3114.65 3905.75,3049.65 3905.75,2929.65 3845.75,2869.65 3740.75,2869.65 3725.75,2854.65 3695.75,2884.65 3680.75,2884.65 3680.75,2894.65 3635.75,2939.65 3635.75,3024.65 3655.75,3044.65 3655.75,3059.65 3795.75,3059.65 3805.75,3069.65 3660.75,3069.65 3660.75,3064.65 3835.75,3064.65 3830.75,3069.65 3675.75,3069.65 3670.75,3074.65 3715.75,3119.65 3815.75,3119.65
  region: 115,295 130,280 225,280 290,215 290,95 230,35 125,35 110,20 80,50 65,50 65,60 20,105 20,190 40,210 40,225 180,225 190,235 45,235 45,230 220,230 215,235 60,235 55,240 100,285 200,285
  lines w7.87: 0,118.11 ccw(c118.11,118.11) 118.11,0 3818.9,0 ccw(c3818.9,118.11) 3937.01,118.11 3937.01,3031.5 ccw(c3818.9,3031.5) 3818.9,3149.61 118.11,3149.61 ccw(c118.11,3031.5) 0,3031.5 0,118.11

## Other copper
Top Layer:
  pour cut-out: 1186.22,2239.18 1083.8,2239.18 1038.8,2194.18 1053.8,2179.18 1290.82,2179.18 1313.92,2156.08 1313.8,2155.97 1313.8,2099.18 1318.8,2099.18 1403.8,2014.18 1398.8,2009.18 1398.8,1914.18 1526.12,1786.86 1591.12,1786.86 1613.43,1809.18 1645.95,1809.18 1695.89,1859.11 1371.06,2183.94 1408.8,2221.68 1408.8,2224.18 1513.8,2224.18 1528.8,2239.18 1748.8,2019.18 1783.8,2019.18 1783.8,2044.18 1803.8,2064.18 1558.8,2309.18 1254.18,2309.18 1175,2230
  pour cut-out: 1665,1900 1625,1940 1710,2025 1717.02,2025 1753.51,1988.51
  pour cut-out: 1606.31,1552.42 1681.43,1552.42 1686.93,1546.93 1645,1505 1645,1185 1610,1185 1605,1190 1606.31,1191.31 1606.31,1550
  pour cut-out: 2969.18,870 3053.58,870 3058.51,865.07 3058.51,773.51 3026.49,773.51 3025,775 3030,780 3030,825 2975,825 2969.18,830.82
  pour cut-out: 915,2505 915,2490 890,2465 1105,2250 1105,2245 1180.39,2245 1060.39,2365 1050,2365 915,2500 890,2475 890,2465
  pour cut-out: 1109.18,2683.8 1109.18,2660.82 1400,2370 1429.09,2399.09 1168.26,2683.8
  pour cut-out: 1840,2220 1840,2100 2080,2100 2080,2215 2080,2220
  pour cut-out: 257.29,702.25 158.11,702.25 128.46,672.6 128.46,558.23 198.23,488.46 263.46,488.46 263.46,617.02 304.91,658.46 639.62,658.46 671.54,626.54 708.46,663.46 708.46,683.46
  pour cut-out: 2230,1510 2525.34,1214.66 2565.34,1214.66 2805,975 2857.02,975 2962.02,870 3045,870 3065,890 3040,915 3040,980 2987.11,1032.89 2987.11,1112.89 2895,1205 2895,1265 2884.42,1265 2411.38,1738.04 2410.28,1738.04
  pour cut-out: 1650,1525 1665,1525 1695,1555 1975,1555 1980,1550 1975,1545 1975,1230 1924.37,1185 1645,1185 1645,1525
  pour cut-out: 1855,2215 1860,2220 2065,2220 2060,2215 2060,2090 1855,2090 1855,2220
Bottom Layer:
  pour cut-out: 1640,1535 1640,1177.61 1927.61,1177.61 1985,1235 1985,1540 1970,1540 1970,1235 1925,1190 1655,1190 1655,1535
  pour cut-out: 1855,2220 2060,2220 2060,2215 2060,2210 2060,2090 1855,2090 1850,2095 1850,2215

## Silkscreen, mask and mechanical layers (free items; w line width, h text height)
Top Overlay:
  text "3V3" at 666,3071 h25
  text "GND" at 486,3066 h25
  text "RST" at 906,2916 h25
  text "GND" at 986,2916 h25
  text "CLK" at 1071,2916 h25
  text "DIO" at 1151,2916 h25
  text "3V3" at 1236,2916 h25
  text "NC" at 2478,2818 h30
  text "GND" at 2978,2723 h30
  text "24V" at 3088,2723 h30
  text "11" at 401,2721 h30
  text "12" at 396,2561 h30
  text "NC" at 3578,2483 h30
  text "13" at 396,2416 h30
  text "14" at 396,2261 h30
  text "15" at 391,2111 h30
  text "GND" at 3453,1993 h30
  text "16" at 391,1956 h30
  text "24V" at 3463,1873 h30
  text "17" at 391,1801 h30
  text "3V3" at 1218,1653 h30
  text "BOOT0" at 1332,1652 h27
  text "18" at 391,1651 h30
  text "8" at 3536,1546 h25
  text "24V" at 393,1448 h35
  text "7" at 3536,1381 h25
  text "GND" at 381,1291 h25
  text "6" at 3526,1226 h25
  text "5" at 3526,1071 h25
  text "4" at 3526,931 h25
  text "NC" at 321,841 h30
  text "3" at 3526,776 h25
  text "24-" at 286,771 h30
  text "2" at 3531,626 h25
  text "1" at 3531,456 h25
  text "24V" at 2296,406 h25
  text "NO" at 2666,396 h25
  text "GND" at 2411,391 h25
  text "NC" at 2909,339 h39
  text "+24V" at 281,271 h30
Mechanical 1:
  the board outline again, w7.87